# Altium PCB 03.STM32F103RCT6_RNF24L01.PcbDoc
Units mm, origin at the board's own origin, x right, y up, seen from the top; angles counter-clockwise.
Board outline 152.4 x 101.6 mm, 2 copper layers (Top Layer, Bottom Layer); 42 components, 44 nets, 255 pads, 0 vias.
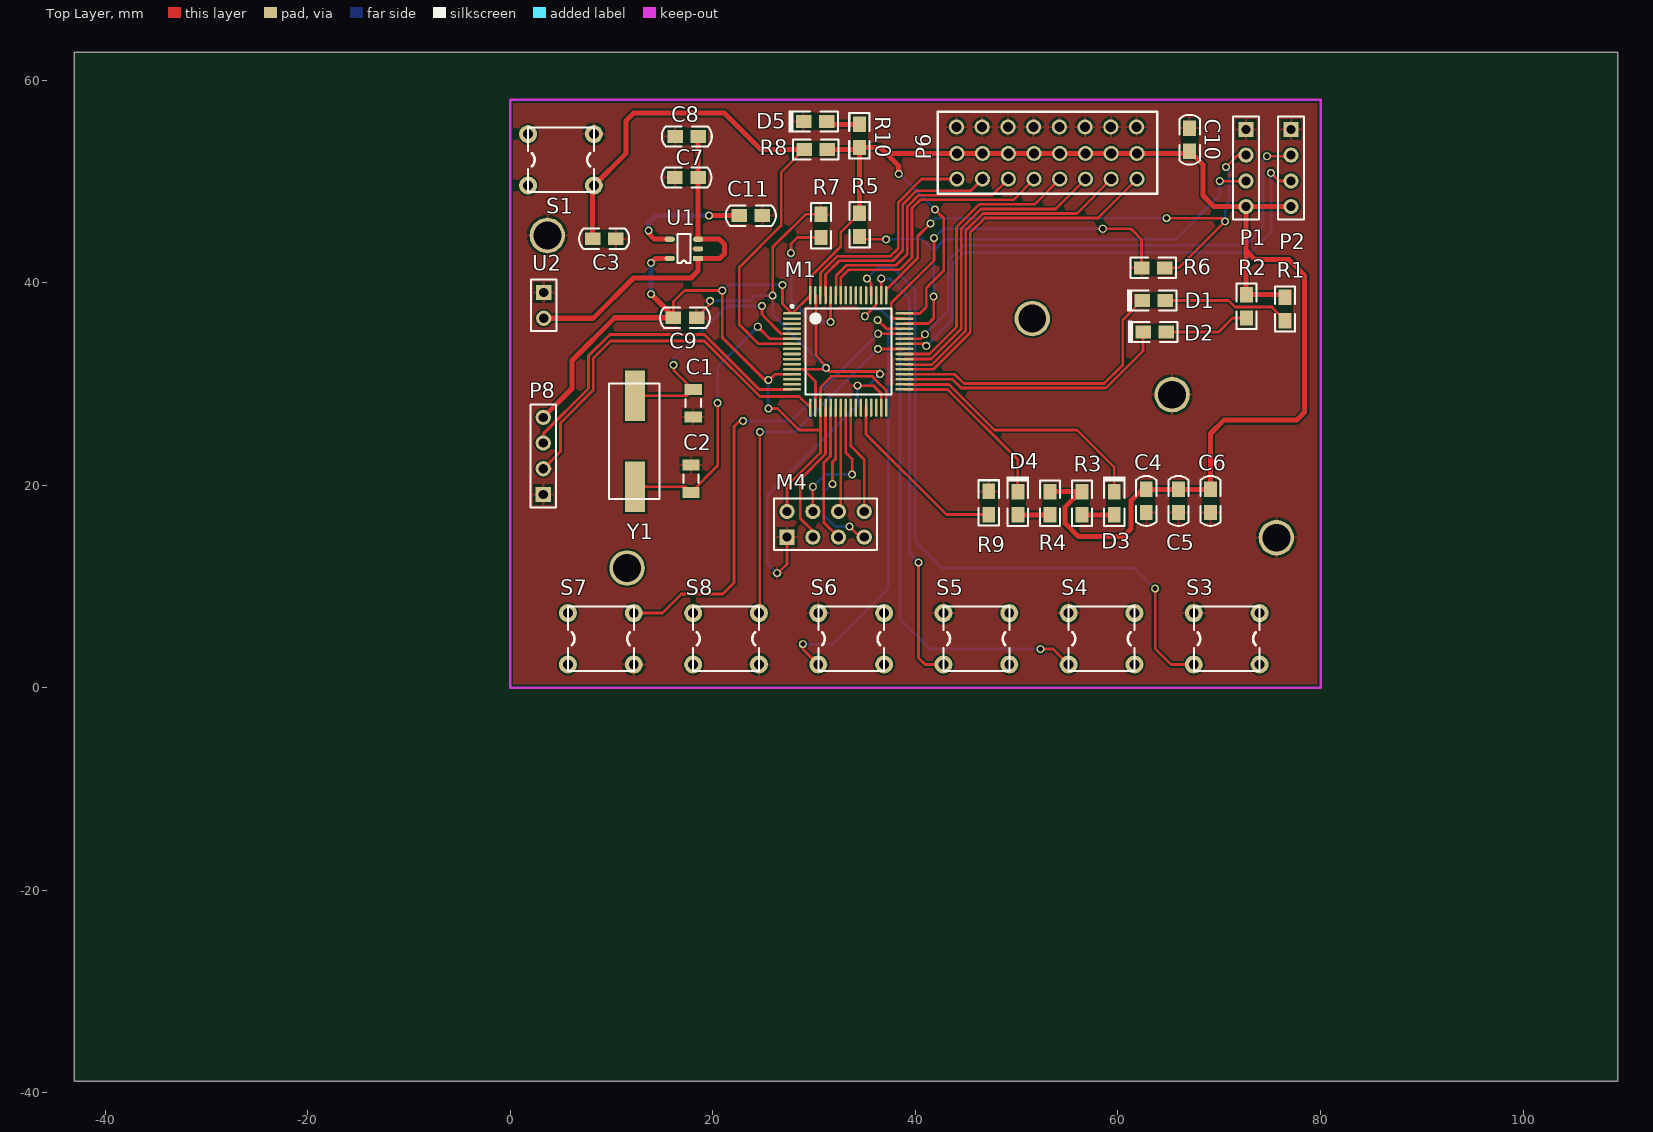
[diagram p0: Top Layer view]
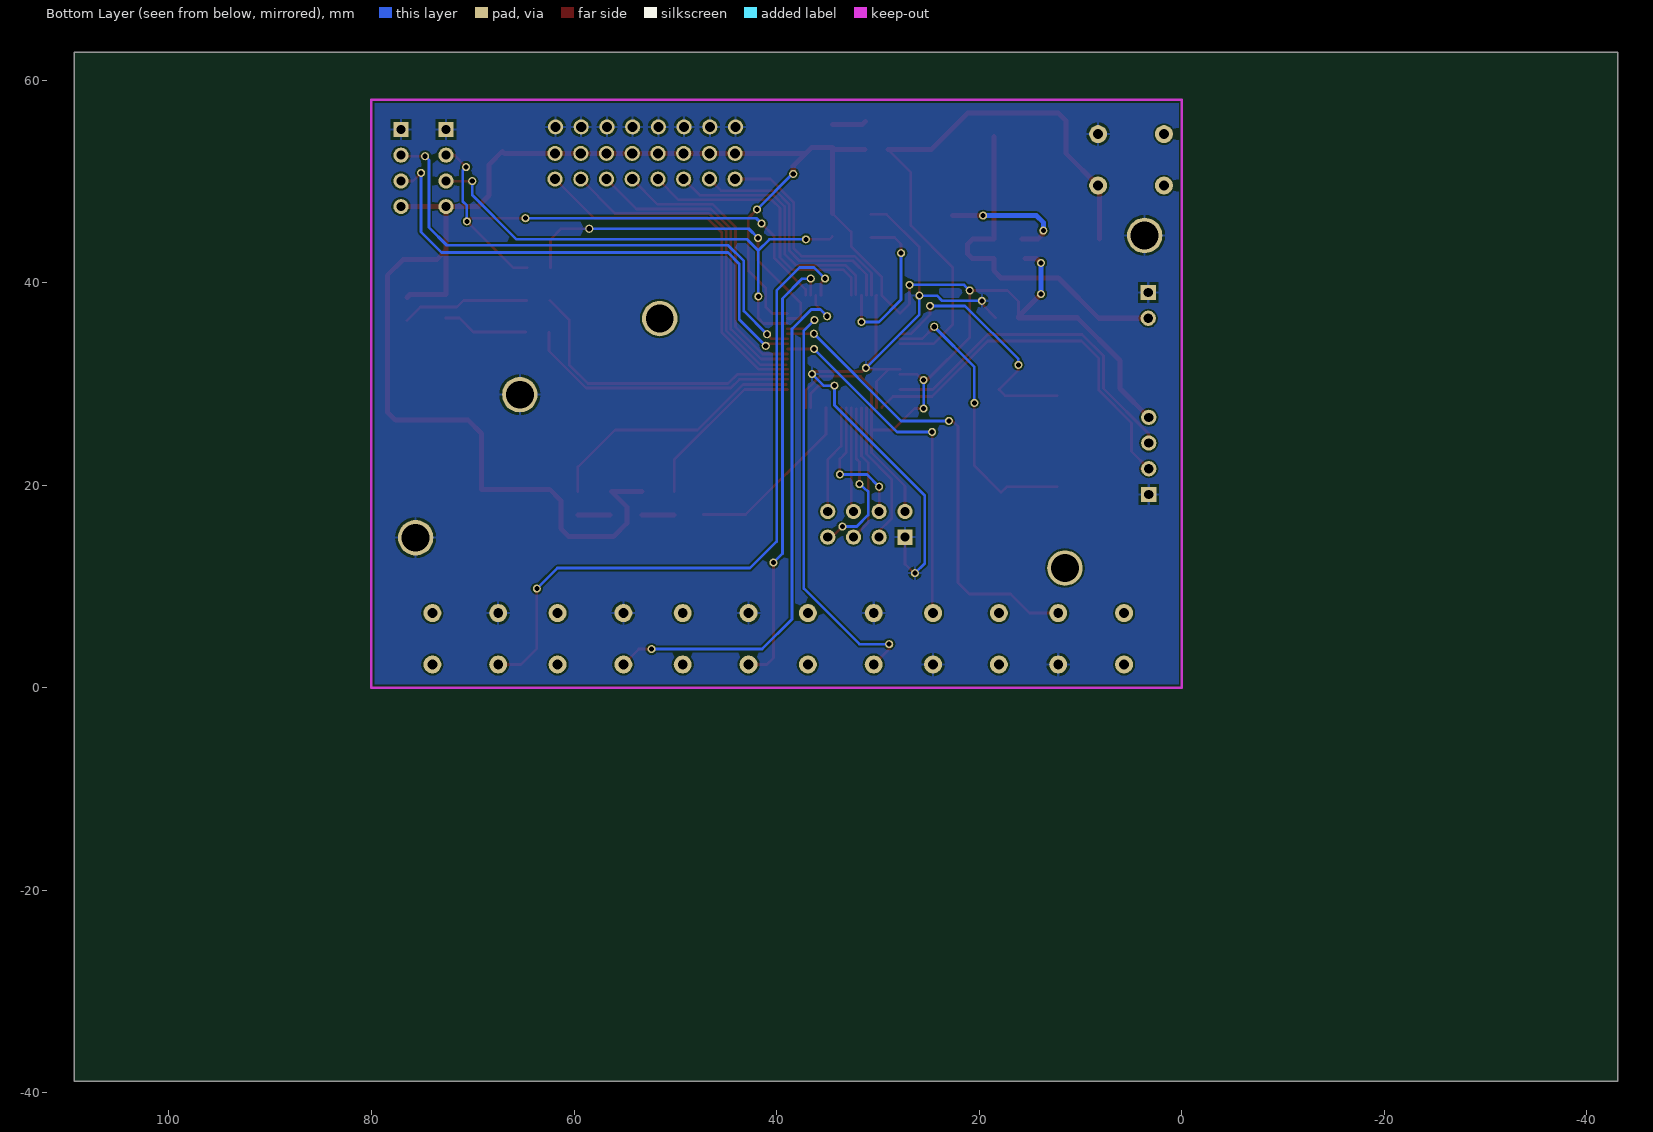
[diagram p1: Bottom Layer view, seen from below]

## Layer stack, top to bottom
Top Solder: solder mask 0.0102, Solder Resist, Dk 3.5
Top Layer: signal copper 0.0356
Dielectric 1: dielectric 0.32, FR-4, Dk 4.8
Bottom Layer: signal copper 0.0356
Bottom Solder: solder mask 0.0102, Solder Resist, Dk 3.5

## Board outline
-43.053,-38.862 109.347,-38.862 109.347,62.738 -43.053,62.738

## Design rules (kind name [scope] priority, off if disabled: settings)
Clearance [All] p1: gap=0.18
Clearance Polygon [All] p2: gap=0.18
PolygonConnect [All] p1: connectstyle=Relief reliefconductorwidth=0.254 reliefentries=4 polygonreliefangle="90 Angle" airgapwidth=0.254
RoutingVias [All] p1: holewidth=0.711 width=1.27 viastyle="Through Hole" minholewidth=0.711 minwidth=1.27 maxholewidth=0.711 maxwidth=1.27
SolderMaskExpansion [All] p1: expansion=0.102
Width [All] p1: maxlimit=0.8 minlimit=0.254 preferedwidth=0.5
30 further rules are at their usual default settings.

## Classes and differential pairs
component class 020.RNF24L01_PWM_BTN: M4 P6 S3 S4 S5 S6 S7 S8
component class 020.STM32F103RCT6_RNF24L01: C1 C2 C3 C4 C5 C6 C7 C8 C9 C10 C11 D1 D2 D3 D4 D5 M1 P1 P2 P8 R1 R2 R3 R4 R5 R6 R7 R8 R9 R10 S1 U1 U2 Y1

## Components (designator, comment, footprint, x,y, rotation, side; value= is the part's Value field where it differs from the comment)
C1 "Cap Semi" C1206 18.059,28.092 r90 top
C2 "Cap Semi" C1206 17.831,20.625 r270 top
C3 "100nF" 0805C 9.271,44.323 r180 top
C4 "100nF" 0805C 62.8,18.439 r90 top
C5 "100nF" 0805C 65.971,18.439 r90 top
C6 "100nF" 0805C 69.142,18.439 r90 top
C7 "10uF" 0805C 17.399,50.368 r180 top
C8 "100nF" 0805C 17.424,54.432 r180 top
C9 "2.2uF" 0805C 17.247,36.525 r0 top
C10 "100nF" 0805C 67.081,54.102 r90 top
C11 "470pf" 0805C 23.749,46.609 r180 top
D1 "LED" 0805_LED 64.668,38.227 r180 top
D2 "LED" 0805_LED 64.77,35.128 r180 top
D3 "LED" 0805_LED 59.628,17.069 r90 top
D4 "LED" 0805_LED 50.114,17.069 r90 top
D5 "LED" 0805_LED 31.242,55.905 r180 top
M1 "STM32F103RCT6" LQFP64 33.376,33.198 r0 top
M4 "NRF24L01" HDR2X4 30.505,17.653 r270 top
P1 "JLINK" HDR1X4 72.644,55.118 r270 top
P2 "HEAD4" HDR1X4 77.089,55.118 r270 top
P6 "8X3" HDR3X8-2.54 61.874,50.216 r180 top
P8 "USART2" HDR1X4 3.251,19.075 r90 top
R1 "1K" 0805 76.505,38.532 r270 top
R2 "1K" 0805 72.695,38.786 r270 top
R3 "1K" 0805 56.457,19.355 r270 top
R4 "1K" 0805 53.286,19.355 r270 top
R5 "4.7K" 0805 34.493,44.552 r90 top
R6 "4.7K" 0805 62.332,41.453 r0 top
R7 "100K" 0805 30.683,46.736 r270 top
R8 "4.7K" 0805 31.293,53.137 r180 top
R9 "100K" 0805 47.244,19.38 r270 top
R10 "1K" 0805 34.468,55.626 r270 top
S1 "SW" SW4-6X6 5.004,52.121 r180 top
S3 "SW" SW4-6X6 70.739,4.826 r0 top
S4 "SW" SW4-6X6 58.379,4.826 r0 top
S5 "SW" SW4-6X6 46.02,4.826 r0 top
S6 "SW" SW4-6X6 33.66,4.826 r0 top
S7 "SW" SW4-6X6 8.941,4.826 r180 top
S8 "SW" SW4-6X6 21.3,4.826 r180 top
U1 "GM6155" SOT-23-5 17.145,43.332 r180 top
U2 "HEAD1X2" HDR1X2 3.302,39.014 r270 top
Y1 "16MHz" XTAL_SMD 12.319,24.333 r270 top

## Footprints (in the part's own frame and the unit in brackets; to place one, negate y for a bottom-side part, rotate by r counter-clockwise, add the part's x,y. Pads: shape width x height; smd on the part's side, far side on the other; paste and mask are expansions set on the pad)
0805 [mil]
  rect 60x50 smd: 1(0,0) 2(90,0)
  silkscreen extent -43,-39 133,39
0805_LED [mil]
  rect 60x50 smd: 1(0,0) 2(90,0)
  silkscreen extent -43,-43 149,43
0805C [mil]
  rect 60x50 smd: 1(-45,0) 2(45,0)
  silkscreen extent -97,-39 97,39
C1206 [mm] "Chip Capacitor, Body 3.2x1.6mm, IPC High Density"
  rect 1.1x1.7 smd: 1(-1.35,0) 2(1.35,0)
  silkscreen extent -0.4,-0.75 0.4,0.75, body extent -1.7,-0.9 1.7,0.9, height 1.3
HDR1X2 [mm] "Connector; Header; 4 Position"
  rect 1.5x1.5 hole 0.9: 1(0,0)
  round 1.5 hole 0.9: 2(2.54,0)
  silkscreen extent -1.27,-1.27 3.81,1.27
HDR1X4 [mm] "Connector; Header; 4 Position"
  rect 1.5x1.5 hole 0.9: 1(0,0)
  round 1.5 hole 0.9: 2(2.54,0) 3(5.08,0) 4(7.62,0)
  silkscreen extent -1.27,-1.27 8.89,1.27
HDR2X4 [mm] "Connector; Header; 4 Position"
  rect 1.5x1.5 hole 0.9: 1(2.794,-3.175)
  round 1.5 hole 0.9: 2(0.254,-3.175) 3(2.794,-0.635) 4(0.254,-0.635) 5(2.794,1.905) 6(0.254,1.905) 7(2.794,4.445) 8(0.254,4.445)
  silkscreen extent -1.02,-4.44 4.06,5.72
HDR3X8-2.54 [mm]
  round 1.5 hole 1: 1(0,0) 2(0,-2.54) 3(0.04,-5.157) 4(2.54,0) 5(2.54,-2.54) 6(2.58,-5.157) 7(5.08,0) 8(5.08,-2.54) 9(5.12,-5.157) 10(7.62,0) 11(7.62,-2.54) 12(7.66,-5.157) 13(10.16,0) 14(10.16,-2.54) 15(10.2,-5.157) 16(12.7,0) 17(12.7,-2.54) 18(12.74,-5.157) 19(15.24,0) 20(15.24,-2.54) 21(15.28,-5.157) 22(17.78,0) 23(17.78,-2.54) 24(17.82,-5.157)
  silkscreen extent -2,-6.66 19.65,1.46
LQFP64 [mm]
  oval 1.8x0.25 smd: 1(-5.55,3.75) 2(-5.55,3.25) 3(-5.55,2.75) 4(-5.55,2.25) 5(-5.55,1.75) 6(-5.55,1.25) 7(-5.55,0.75) 8(-5.55,0.25) 9(-5.55,-0.25) 10(-5.55,-0.75) 11(-5.55,-1.25) 12(-5.55,-1.75) 13(-5.55,-2.25) 14(-5.55,-2.75) 15(-5.55,-3.25) 16(-5.55,-3.75) 33(5.55,-3.75) 34(5.55,-3.25) 35(5.55,-2.75) 36(5.55,-2.25) 37(5.55,-1.75) 38(5.55,-1.25) 39(5.55,-0.75) 40(5.55,-0.25) 41(5.55,0.25) 42(5.55,0.75) 43(5.55,1.25) 44(5.55,1.75) 45(5.55,2.25) 46(5.55,2.75) 47(5.55,3.25) 48(5.55,3.75)
  oval 0.25x1.8 smd: 17(-3.75,-5.55) 18(-3.25,-5.55) 19(-2.75,-5.55) 20(-2.25,-5.55) 21(-1.75,-5.55) 22(-1.25,-5.55) 23(-0.75,-5.55) 24(-0.25,-5.55) 25(0.25,-5.55) 26(0.75,-5.55) 27(1.25,-5.55) 28(1.75,-5.55) 29(2.25,-5.55) 30(2.75,-5.55) 31(3.25,-5.55) 32(3.75,-5.55) 49(3.75,5.55) 50(3.25,5.55) 51(2.75,5.55) 52(2.25,5.55) 53(1.75,5.55) 54(1.25,5.55) 55(0.75,5.55) 56(0.25,5.55) 57(-0.25,5.55) 58(-0.75,5.55) 59(-1.25,5.55) 60(-1.75,5.55) 61(-2.25,5.55) 62(-2.75,5.55) 63(-3.25,5.55) 64(-3.75,5.55)
  silkscreen extent -5.67,-4.25 4.25,4.57
SOT-23-5 [mil]
  rect 40x20 smd: 1(-55,37.4)
  oval 40x20 smd: 2(-55,0) 3(-55,-37.4) 4(55,-37.4) 5(55,37.4)
  silkscreen extent -25,-57 26,55, body extent -55,-57 55,57, height 43
SW4-6X6 [mil]
  round 70 hole 38: 1(-127.95,-100) 2(-127.95,100) 3(127.95,-100) 4(127.95,100)
  silkscreen extent -128,-125 128,125
XTAL_SMD [mm]
  rect 5x2 smd: 1(-4.5,0) 2(4.5,0)
  silkscreen extent -5.72,-2.59 5.68,2.41

## Part data
C1 C2: "Capacitor (Semiconductor SIM Model)"
C3 C4 C5 C6 C7 C8 C9 C10 C11: library part Cap, "Capacitor"
D1 D2 D3 D4 D5: "Typical RED GaAs LED"
P1 P8: library part "Header 4", "Header, 4-Pin"
R1 R2 R3 R4 R5 R6 R7 R8 R9 R10: library part "Res Semi", "Semiconductor Resistor"
S1 S3 S4 S5 S6 S7 S8: "Switch"
Y1: library part XTAL, "Crystal Oscillator"

## Free pads (board coordinates)
  round 0.8 hole 0.5: 4(13.894,38.862) 5(13.894,41.935) 6(13.665,45.136) 7(19.609,46.609) 9(41.808,38.633) 10(37.109,44.272) 11(70.053,50.013) 12(70.587,46.05) 13(70.663,51.41) 14(41.072,33.757) 15(40.945,34.9) 16(74.701,52.476) 17(75.108,50.825) 19(64.795,46.355) 20(33.503,15.9) 22(31.82,20.099) 23(36.325,34.948) 25(36.301,33.448) 26(24.638,25.248) 27(36.271,36.297) 28(28.88,4.293) 29(35.003,36.676) 30(52.349,3.81) 31(36.626,40.387) 32(40.31,12.344) 34(35.204,40.386) 35(63.678,9.779) 36(41.935,47.219) 37(38.354,50.724) 38(29.87,19.837) 39(29.87,19.837) 40(33.757,21.057) 41(36.5,30.963) 42(34.29,29.82) 43(31.191,31.572) 45(25.908,38.71) 46(31.626,36.116) 47(27.711,42.901) 48(27.711,42.901) 50(20.93,39.218) 54(41.478,45.822) 55(26.34,11.303) 56(41.834,44.399) 57(58.496,45.314) 69(25.476,27.559) 70(25.476,30.378) 71(22.987,26.34) 72(26.873,39.776) 73(24.841,37.694) 74(16.129,31.877) 75(20.472,28.118) 76(24.435,35.636) 79(19.736,38.202)
  round 3.5 hole 2.75: 66(75.641,14.808) 67(65.354,28.931) 68(3.658,44.653) 77(11.532,11.811) 78(51.537,36.449)

## Nets (pads, with @x,y where several pads share a name; then routed paths per layer and width w, separated by ;. In a path a pad name is that pad's centre, name@x,y a point inside that pad or via, vN(x,y) a via of type N, cw(c..) or ccw(c..) an arc to the next point about the centre after c; other vN are vias at no path point)
3V3: C4.2 C5.2 C6.2 C9.1 C10.1 M1.1 M1.13 M1.19 M1.32 M1.48 M1.64 M4.2 P1.4 P2.4 P6.2 P6.5 P6.8 P6.11 P6.14 P6.17 P6.20 P6.23 P8.4 pad.4 pad.5 pad.36 pad.37 pad.50 pad.69 pad.70 pad.72 R1.1 R2.1 R3.1 R4.1 R5.2 R8.1 R10.2 U1.5 | length 252
  Top Layer w0.27: C9.1 16.104,36.652 16.104,38.125 17.196,39.218 pad.50 20.93,34.595 25.171,30.353 25.552,30.353 26.147,30.948 M1.13 ; pad.69 26.391,27.559 28.499,25.451 30.626,25.451 ; pad.72 26.873,37.9 M1.1 M1.64 29.626,40.573 32.639,43.586 32.639,44.983 R5.2 ; M4.2 27.33,19.914 30.626,23.209 30.626,25.451 ; M1.32 37.126,29.346 36.224,30.248 36.204,30.248 35.692,30.759 31.699,30.759 31.699,30.709 30.626,29.635 M1.19 30.626,25.451 ; M1.48 40.428,36.948 41.072,37.592 41.072,39.446 42.799,41.173 42.799,46.355 pad.36
  Top Layer w0.5: P8.4 6.096,29.54 6.096,32.309 10.312,36.525 C9.1 ; pad.4 C9.1@16.104,36.652 ; pad.5 14.341,42.382 U1.5@15.458,42.382 ; R8.1 34.265,53.137 R10.2 ; R5.2 34.468,46.863 R10.2 ; pad.37 38.354,51.511 37.109,52.756 ; R4.1 56.29,19.355 54.788,17.853 54.788,16.231 56.109,14.91 60.503,14.91 61.29,15.697 61.29,18.466 62.406,19.582 C4.2 C5.2 C6.2 69.142,25.099 70.46,26.416 77.622,26.416 78.435,27.229 78.435,40.716 76.886,42.266 73.546,42.266 72.644,43.167 ; R1.1 76.2,38.837 72.644,38.837 72.644,43.167 ; P2.4 P1.4 ; R10.2 36.525,53.34 37.109,52.756 ; 37.109,52.756 P6.23 P6.20 P6.17 P6.14 P6.11 P6.8 P6.5 P6.2 66.878,52.756 C10.1 68.402,51.638 68.402,48.59 69.494,47.498 P1.4 ; 72.644,43.167 P1.4
  Bottom Layer w0.27: pad.50 21.488,39.776 pad.72 ; pad.69 pad.70 ; pad.37@38.354,50.8 pad.36
  Bottom Layer w0.5: pad.4 pad.5
5V: C7.1 C8.1 U1.1 U1.3 U2.2 | length 35.1
  Top Layer w0.5: U2.2 8.179,36.474 12.167,40.462 17.831,40.462 18.542,41.173 U1.1 20.691,42.382 21.133,42.824 21.133,43.815 20.665,44.282 U1.3 C7.1 C8.1@18.542,54.407
GND: C1.1 C2.1 C3.1 C4.1 C5.1 C6.1 C7.2 C8.2 C9.2 C10.2 C11.1 D5.2 M1.12 M1.18 M1.31 M1.47 M1.63 M4.1 P1.1 P2.1 P6.3 P6.6 P6.9 P6.12 P6.15 P6.18 P6.21 P6.24 P8.1 pad.41 pad.42 pad.43 pad.45 pad.55 pad.56 pad.57 pad.66 pad.67 pad.68 pad.79 R6.1 R7.1 R9.1 S1.1 S3.2 S4.2 S5.2 S6.2 S7.2 S8.2 U1.2 U2.1 | length 118.2
  Top Layer w0.27: C9.2 19.736,37.871 pad.79 ; pad.45 25.908,43.485 29.159,46.736 R7.1 ; pad.55 26.441,11.303 27.33,12.192 M4.1 ; M1.12 28.903,31.448 ; M1.18 30.126,30.225 28.903,31.448 ; M1.63 30.176,38.698 30.176,32.795 31.191,31.779 pad.43 ; pad.42 35.839,29.82 36.626,29.033 M1.31 ; pad.41 36.5,31.209 31.554,31.209 pad.43 ; M1.47 37.847,36.448 37.617,36.678 37.617,37.967 41.834,42.184 pad.56 ; pad.57 61.29,45.314 62.332,44.272 R6.1 ; 28.903,31.448 31.067,31.448 pad.43
  Bottom Layer w0.27: pad.79 23.647,38.202 24.155,38.71 pad.45 25.908,36.855 pad.43 ; pad.55 25.375,12.268 25.375,18.974 34.29,27.889 pad.42 35.357,29.82 pad.41 ; pad.56 42.748,45.314 pad.57
NetC1_2: C1.2 M1.5 pad.73 pad.74 Y1.1 | length 25.3
  Top Layer w0.27: Y1.1 17.45,28.833 C1.2 16.129,31.373 pad.74 ; pad.73 24.841,36.855 26.749,34.948 M1.5
  Bottom Layer w0.27: pad.74 16.129,32.436 21.387,37.694 pad.73
NetC2_2: C2.2 M1.6 pad.75 pad.76 Y1.2 | length 28.7
  Top Layer w0.27: Y1.2 17.272,19.833 C2.2 20.472,21.916 pad.75 ; pad.76 25.623,34.448 M1.6
  Bottom Layer w0.27: pad.75 20.472,31.674 pad.76
NetC3_2: C3.2 M1.7 R8.2 S1.2 | length 58.3
  Top Layer w0.27: M1.7 24.523,33.948 22.606,35.865 22.606,41.478 26.746,45.618 26.746,50.876 R8.2
  Top Layer w0.5: C3.2 8.128,49.455 S1.2 11.405,52.732 11.405,55.956 12.192,56.744 21.133,56.744 24.74,53.137 R8.2
NetC11_2: C11.2 pad.6 pad.7 U1.4 | length 12.6
  Top Layer w0.5: pad.6 13.665,44.831 14.214,44.282 U1.4 ; pad.7 C11.2
  Bottom Layer w0.5: pad.6 13.665,45.949 14.326,46.609 pad.7
NetD1_1: D1.1 R1.2 | length 12.7
  Top Layer w0.27: D1.1 70.917,38.227 71.567,37.577 75.174,37.577 R1.2
NetD1_2: D1.2 M1.36 | length 29.8
  Top Layer w0.27: M1.36 43.881,30.948 44.787,30.041 58.641,30.041 60.477,31.877 60.477,36.322 D1.2
NetD2_1: D2.1 R2.2 | length 8.5
  Top Layer w0.27: D2.1 69.952,35.128 71.323,36.5 R2.2
NetD2_2: D2.2 M1.35 | length 27.3
  Top Layer w0.27: M1.35 43.669,30.448 44.526,29.591 58.828,29.591 62.484,33.247 D2.2
NetD3_1: D3.1 R3.2 | length 3.2
  Top Layer w0.5: R3.2 D3.1
NetD3_2: D3.2 M1.34 | length 26.4
  Top Layer w0.27: M1.34@39.044,29.947 43.307,29.947 47.803,25.451 55.956,25.451 59.628,21.779 D3.2
NetD4_1: D4.1 R4.2 | length 3.2
  Top Layer w0.5: D4.1 R4.2
NetD4_2: D4.2 M1.33 | length 17.2
  Top Layer w0.27: M1.33 43.169,29.448 50.114,22.503 D4.2
NetD5_1: D5.1 R10.1 | length 3.3
  Top Layer w0.5: D5.1 31.521,55.626 R10.1
NetM1_16: M1.16 P8.3 | length 33.7
  Top Layer w0.27: P8.3 3.251,25.071 7.731,29.551 7.731,32.775 9.83,34.874 19.153,34.874 24.579,29.448 M1.16
NetM1_17: M1.17 P8.2 | length 38.6
  Top Layer w0.27: 4.039,21.615 P8.2 4.953,23.317 4.953,26.137 8.181,29.364 8.181,32.514 9.906,34.239 19.152,34.239 24.638,28.753 28.521,28.753 M1.17
NetM1_20: M1.20 M4.3 | length 14.3
  Top Layer w0.27: M4.3 29.87,15.469 28.626,16.713 28.626,20.573 31.126,23.072 M1.20
NetM1_21: M1.21 M4.5 | length 13.7
  Top Layer w0.27: M1.21 31.626,22.863 30.937,22.174 30.937,16.332 M4.5
NetM1_22: M1.22 M4.7 pad.20 pad.22 | length 15.9
  Top Layer w0.27: pad.22 31.82,22.295 32.131,22.606 M1.22@32.131,27.542 ; pad.20 34.544,14.859 M4.7
  Bottom Layer w0.27: pad.22 30.963,19.38 30.963,17.043 32.082,15.924 33.503,15.924 pad.20
NetM1_23: M1.23 M4.6 | length 10.3
  Top Layer w0.27: M4.6 32.626,17.614 M1.23
NetM1_24: M1.24 M4.4 pad.38 pad.39 pad.40 | length 13.7
  Top Layer w0.27: M4.4 pad.38 ; M1.24 33.126,23.212 33.757,22.581 pad.40
  Bottom Layer w0.27: pad.38 31.09,21.057 pad.40
NetM1_25: M1.25 M4.8 | length 10.8
  Top Layer w0.27: M1.25 33.626,23.855 34.95,22.53 M4.8
NetM1_28: M1.28 R9.2 | length 18
  Top Layer w0.27: M1.28 35.126,25.022 43.053,17.094 R9.2
NetM1_37: M1.37 P6.1 | length 36.5
  Top Layer w0.27: M1.37 41.811,31.448 45.415,35.052 45.415,44.933 46.855,46.373 58.031,46.373 P6.1
NetM1_38: M1.38 P6.4 | length 33.6
  Top Layer w0.27: M1.38@39.076,31.898 41.625,31.898 44.965,35.238 44.965,45.119 46.669,46.823 55.941,46.823 P6.4
NetM1_39: M1.39 P6.7 | length 31
  Top Layer w0.27: M1.39 41.538,32.448 44.515,35.425 44.515,45.305 46.483,47.273 53.851,47.273 P6.7
NetM1_40: M1.40 P6.10 | length 28.3
  Top Layer w0.27: M1.40 41.402,32.948 44.065,35.611 44.065,45.492 46.296,47.723 51.761,47.723 P6.10
NetM1_41: M1.41 pad.25 pad.26 S8.1 | length 35.6
  Top Layer w0.27: S8.1 24.638,7.454 pad.26 ; pad.25 M1.41
  Bottom Layer w0.27: pad.26 28.1,25.248 pad.25
NetM1_42: M1.42 P2.3 pad.14 pad.17 | length 52.3
  Top Layer w0.27: M1.42 40.881,33.948 pad.14 ; pad.17 75.895,50.038 P2.3
  Bottom Layer w0.27: pad.14 43.688,36.373 43.688,41.834 44.813,42.959 73.083,42.959 75.108,44.983 pad.17
NetM1_43: M1.43 P2.2 pad.15 pad.16 | length 52.3
  Top Layer w0.27: M1.43 40.493,34.448 pad.15 ; pad.16 P2.2@76.987,52.476
  Bottom Layer w0.27: pad.15 43.231,37.186 43.231,42.113 44.806,43.688 72.568,43.688 74.32,45.441 74.32,52.095 pad.16
NetM1_44: M1.44 pad.23 pad.71 S7.1 | length 47.2
  Top Layer w0.27: S7.1 15.011,7.366 16.891,9.246 20.98,9.246 22.098,10.363 22.098,25.806 22.631,26.34 pad.71 ; pad.23 M1.44
  Bottom Layer w0.27: pad.71 27.717,26.34 pad.23
NetM1_45: M1.45 pad.27 pad.28 S6.1 | length 43.3
  Top Layer w0.27: pad.28 28.88,3.816 S6.1 ; pad.27 37.12,35.448 M1.45
  Bottom Layer w0.27: pad.28 31.826,4.293 37.313,9.779 37.313,35.255 pad.27
NetM1_46: M1.46 P1.3 pad.9 pad.10 pad.11 R5.1 | length 52.1
  Top Layer w0.27: R5.1 34.773,44.272 pad.10 ; M1.46 41.282,35.948 41.808,36.474 pad.9 ; pad.11 P1.3@72.619,50.013
  Bottom Layer w0.27: pad.10 40.716,44.272 41.808,43.18 ; pad.9 41.808,43.18 ; pad.11 70.053,48.641 65.684,44.272 42.901,44.272 41.808,43.18
NetM1_49: M1.49 P1.2 pad.12 pad.13 pad.19 pad.54 R6.2 | length 54.3
  Top Layer w0.27: M1.49 37.126,39.309 40.234,42.417 40.234,44.577 pad.54 ; R6.2 65.989,41.453 pad.12 70.282,46.355 pad.19 ; pad.13 71.831,52.578 P1.2
  Bottom Layer w0.27: pad.54 42.012,46.355 pad.19 ; pad.12 70.587,47.6 70.993,48.006 70.993,51.079 pad.13
NetM1_50: M1.50 pad.31 pad.32 S5.1 | length 43.8
  Top Layer w0.27: M1.50 pad.31 ; pad.32 40.31,2.946 40.97,2.286 S5.1
  Bottom Layer w0.27: pad.31 37.464,40.387 39.421,38.43 39.421,13.233 pad.32
NetM1_51: M1.51 pad.29 pad.30 S4.1 | length 54.3
  Top Layer w0.27: pad.29 36.126,37.799 M1.51 ; pad.30 53.605,3.81 S4.1
  Bottom Layer w0.27: pad.29 35.665,37.338 36.576,37.338 38.481,35.433 38.481,6.756 41.427,3.81 pad.30
NetM1_52: M1.52 pad.34 pad.35 S3.1 | length 68.8
  Top Layer w0.27: pad.34 35.626,39.965 M1.52 ; pad.35 63.678,3.861 65.253,2.286 S3.1
  Bottom Layer w0.27: pad.34 36.297,41.478 37.744,41.478 39.992,39.23 39.992,14.44 42.621,11.811 61.646,11.811 pad.35
NetM1_58: M1.58 P6.13 | length 27.7
  Top Layer w0.27: M1.58@32.636,38.748 32.636,40.508 33.384,41.257 38.437,41.257 39.653,42.473 39.653,47.345 40.481,48.173 49.671,48.173 P6.13
NetM1_59: M1.59 P6.16 | length 25.6
  Top Layer w0.27: M1.59@32.186,38.808 32.186,40.695 33.198,41.707 38.1,41.707 39.203,42.81 39.203,47.532 40.294,48.623 47.581,48.623 P6.16
NetM1_60: M1.60 pad.46 pad.47 pad.48 R7.2 | length 16.2
  Top Layer w0.27: pad.47 27.711,43.815 28.346,44.45 R7.2 ; pad.46 M1.60
  Bottom Layer w0.27: pad.47 27.711,38.303 29.898,36.116 pad.46
NetM1_61: M1.61 P6.19 | length 24.1
  Top Layer w0.27: M1.61 31.126,40.8 32.482,42.157 37.763,42.157 38.753,43.147 38.753,47.718 40.108,49.073 45.491,49.073 P6.19
NetM1_62: M1.62 P6.22 | length 22.2
  Top Layer w0.27: M1.62 30.626,40.937 32.296,42.607 37.552,42.607 38.303,43.358 38.303,47.904 40.615,50.216 P6.22
pads on no net: M1.2 M1.3 M1.4 M1.8 M1.9 M1.10 M1.11 M1.14 M1.15 M1.26 M1.27 M1.29 M1.30 M1.53 M1.54 M1.55 M1.56 M1.57 S1.3 S1.4 S3.3 S3.4 S4.3 S4.4 S5.3 S5.4 S6.3 S6.4 S7.3 S7.4 S8.3 S8.4

## Polygon pours and split planes (outlines as drawn)
GND on Bottom Layer "Top Layer-No Net" (solid, pour order 20): -0.178,58.268 0,58.09 0,58.039 80.01,58.039 80.01,0 0,0
GND on Top Layer "Top Layer-No Net" (solid, pour order 22): 0,58.039 80.01,58.039 80.01,0 0,0

## Keep-outs
Keep-Out Layer:
  lines w0.254: 0,0 80.01,0 80.01,58.039 0,58.039 0,0